# EAGLE board CT_schematic (EAGLE 7.6.0)

Size 100 x 80 mm. Coordinates in mm from the lower left corner, seen from the top.
Outline: 0,0 100,0 100,80 0,80 0,0
Copper layers (1*16): Top 0.035mm / dielectric 1.5mm / Bottom 0.035mm
Design rules "default": minimum track width 10mil, minimum drill 24mil, track to track 8mil, track to pad 8mil, pad to pad 8mil, via to via 8mil, smd to smd 8mil, copper to edge 40mil, drill to drill 8mil, minimum pad ring 10mil, minimum via ring 8mil, stop-mask expansion 4mil, vias tented up to drill 0mil, thermal gap 10mil

## Footprints (pad centres in the part's own frame; a part is rotated, then mirrored left to right if it is on the bottom)
C0603 = smd 0.8 x 0.8: 1 -0.762,0; 2 0.762,0
C0402 = smd 0.5 x 0.5: 1 -0.508,0; 2 0.508,0
C1210 = smd 1.2 x 2.5: 1 -1.524,0; 2 1.524,0
R0603 = smd 0.8 x 0.8: 1 -0.762,0; 2 0.762,0
EXV-9H = smd 3.505 x 1.676: 1 -2.857,0; 2 2.857,0
L0603 = smd 0.8 x 0.8: 1 -0.762,0; 2 0.762,0
IND25X25CZ = smd 2.489 x 3.429: 1 -2.718,0; 2 2.718,0
PJ-037B_PACKAGE = drill 3.7 square: 1 12,0 | drill 3.2 square: 2 6,0
UFBGA176_25 = smd 0.3 x 0.3: A1 -4.55,4.55; A2 -3.9,4.55; A3 -3.25,4.55; A4 -2.6,4.55; A5 -1.95,4.55; A6 -1.3,4.55; A7 -0.65,4.55; A8 0,4.55; A9 0.65,4.55; A10 1.3,4.55; A11 1.95,4.55; A12 2.6,4.55; A13 3.25,4.55; A14 3.9,4.55; A15 4.55,4.55; B1 -4.55,3.9; B2 -3.9,3.9; B3 -3.25,3.9; B4 -2.6,3.9; B5 -1.95,3.9; B6 -1.3,3.9; B7 -0.65,3.9; B8 0,3.9; B9 0.65,3.9; B10 1.3,3.9; B11 1.95,3.9; B12 2.6,3.9; B13 3.25,3.9; B14 3.9,3.9; B15 4.55,3.9; C1 -4.55,3.25; C2 -3.9,3.25; C3 -3.25,3.25; C4 -2.6,3.25; C5 -1.95,3.25; C6 -1.3,3.25; C7 -0.65,3.25; C8 0,3.25; C9 0.65,3.25; C10 1.3,3.25; C11 1.95,3.25; C12 2.6,3.25; C13 3.25,3.25; C14 3.9,3.25; C15 4.55,3.25; D1 -4.55,2.6; D2 -3.9,2.6; D3 -3.25,2.6; D4 -2.6,2.6; D5 -1.95,2.6; D6 -1.3,2.6; D7 -0.65,2.6; D8 0,2.6; D9 0.65,2.6; D10 1.3,2.6; D11 1.95,2.6; D12 2.6,2.6; D13 3.25,2.6; D14 3.9,2.6; D15 4.55,2.6; E1 -4.55,1.95; E2 -3.9,1.95; E3 -3.25,1.95; E4 -2.6,1.95; E12 2.6,1.95; E13 3.25,1.95; E14 3.9,1.95; E15 4.55,1.95; F1 -4.55,1.3; F2 -3.9,1.3; F3 -3.25,1.3; F4 -2.6,1.3; F6 -1.3,1.3; F7 -0.65,1.3; F8 0,1.3; F9 0.65,1.3; F10 1.3,1.3; F12 2.6,1.3; F13 3.25,1.3; F14 3.9,1.3; F15 4.55,1.3; G1 -4.55,0.65; G2 -3.9,0.65; G3 -3.25,0.65; G4 -2.6,0.65; G6 -1.3,0.65; G7 -0.65,0.65; G8 0,0.65; G9 0.65,0.65; G10 1.3,0.65; G12 2.6,0.65; G13 3.25,0.65; G14 3.9,0.65; G15 4.55,0.65; H1 -4.55,0; H2 -3.9,0; H3 -3.25,0; H4 -2.6,0; H6 -1.3,0; H7 -0.65,0; H8 0,0; H9 0.65,0; H10 1.3,0; H12 2.6,0; H13 3.25,0; H14 3.9,0; H15 4.55,0; J1 -4.55,-0.65; J2 -3.9,-0.65; J3 -3.25,-0.65; J4 -2.6,-0.65; J6 -1.3,-0.65; J7 -0.65,-0.65; J8 0,-0.65; J9 0.65,-0.65; J10 1.3,-0.65; J12 2.6,-0.65; J13 3.25,-0.65; J14 3.9,-0.65; J15 4.55,-0.65; K1 -4.55,-1.3; K2 -3.9,-1.3; K3 -3.25,-1.3; K4 -2.6,-1.3; K6 -1.3,-1.3; K7 -0.65,-1.3; K8 0,-1.3; K9 0.65,-1.3; K10 1.3,-1.3; K12 2.6,-1.3; K13 3.25,-1.3; K14 3.9,-1.3; K15 4.55,-1.3; L1 -4.55,-1.95; L2 -3.9,-1.95; L3 -3.25,-1.95; L4 -2.6,-1.95; L12 2.6,-1.95; L13 3.25,-1.95; L14 3.9,-1.95; L15 4.55,-1.95; M1 -4.55,-2.6; M2 -3.9,-2.6; M3 -3.25,-2.6; M4 -2.6,-2.6; M5 -1.95,-2.6; M6 -1.3,-2.6; M7 -0.65,-2.6; M8 0,-2.6; M9 0.65,-2.6; M10 1.3,-2.6; M11 1.95,-2.6; M12 2.6,-2.6; M13 3.25,-2.6; M14 3.9,-2.6; M15 4.55,-2.6; N1 -4.55,-3.25; N2 -3.9,-3.25; N3 -3.25,-3.25; N4 -2.6,-3.25; N5 -1.95,-3.25; N6 -1.3,-3.25; N7 -0.65,-3.25; N8 0,-3.25; N9 0.65,-3.25; N10 1.3,-3.25; N11 1.95,-3.25; N12 2.6,-3.25; N13 3.25,-3.25; N14 3.9,-3.25; N15 4.55,-3.25; P1 -4.55,-3.9; P2 -3.9,-3.9; P3 -3.25,-3.9; P4 -2.6,-3.9; P5 -1.95,-3.9; P6 -1.3,-3.9; P7 -0.65,-3.9; P8 0,-3.9; P9 0.65,-3.9; P10 1.3,-3.9; P11 1.95,-3.9; P12 2.6,-3.9; P13 3.25,-3.9; P14 3.9,-3.9; P15 4.55,-3.9; R1 -4.55,-4.55; R2 -3.9,-4.55; R3 -3.25,-4.55; R4 -2.6,-4.55; R5 -1.95,-4.55; R6 -1.3,-4.55; R7 -0.65,-4.55; R8 0,-4.55; R9 0.65,-4.55; R10 1.3,-4.55; R11 1.95,-4.55; R12 2.6,-4.55; R13 3.25,-4.55; R14 3.9,-4.55; R15 4.55,-4.55
SAMTEC_FTSH-105-01-L-DV-K = smd 0.762 x 2.794: 1 -2.54,-2.032; 2 -2.54,2.032; 3 -1.27,-2.032; 4 -1.27,2.032; 5 0,-2.032; 6 0,2.032; 7 1.27,-2.032; 8 1.27,2.032; 9 2.54,-2.032; 10 2.54,2.032
TDFN-8/6MM = smd 0.3 x 0.75: 1 0,0; 2 0.5,0; 3 1,0; 4 1.5,0; 5 1.5,3; 6 1,3; 7 0.5,3; 8 0,3
SOIC-8 = smd 1.6 x 0.6: 1 -2.7,1.905 | smd 1.55 x 0.6: 2 -2.7,0.635; 3 -2.7,-0.635; 4 -2.7,-1.905; 5 2.7,-1.905; 6 2.7,-0.635; 7 2.7,0.635; 8 2.7,1.905
182-009-MALE = drill 1.194 pad 1.524 octagon: 1 -5.537,10.923; 2 -2.769,10.923; 3 0,10.923; 4 2.769,10.923; 5 5.537,10.923; 6 -4.153,8.08; 7 -1.384,8.08; 8 1.384,8.08; 9 4.153,8.08 | hole 3.048: -12.446,9.501; 12.446,9.501
ABS07-32.768KHZ-7-T = smd 1.1 x 2.4: 1 -2.5,0; 2 0,0
ASFL1 = smd 1.7 x 1.5: 1 -1.27,-1.1; 2 1.27,-1.1; 3 1.27,1.1; 4 -1.27,1.1
IR3899MTR1PBF = smd 0.25 x 0.75: 1 0,0; 2 0.5,0; 3 1,0; 4 1.5,0; 5 2,0; 6 2.5,0; 7 3,0 | smd 0.75 x 0.25: 8 3.425,0.78; 9 3.425,1.28; 10 3.425,1.78; 14 -0.425,1.78; 15 -0.425,1.28; 16 -0.425,0.78 | smd 0.3 x 1.95: 11 3.22,3.63 | smd 1.62 x 2.42: 12 1.786,3.8 | smd 1 x 1.95: 13 0.117,3.63 | smd 2.19 x 1.25: 17 1.51,1.26
WSON-8 = smd 0.3 x 0.6: 1 -0.75,0; 2 0.05,0; 3 0.85,0; 4 1.65,0; 5 1.65,3.8; 6 0.85,3.8; 7 0.05,3.8; 8 -0.75,3.8 | smd 3 x 2.6: PAD 0.45,1.9
SON-6 = smd 0.55 x 0.3: 1 -0.355,0.5 | smd 0.52 x 0.3: 2 -0.37,0; 3 -0.37,-0.5; 4 0.37,-0.5; 5 0.37,0; 6 0.37,0.5
SW_4-1437565-2 = smd 1.4 x 2.1: 1 -2.23,4.55; 2 -2.23,-4.55; 3 2.23,4.55; 4 2.23,-4.55
LGM67K-G1J2-24-Z = smd 0.8 x 1.4: A -2,0; C 0,0
NC7SZ125M5X = smd 1.3 x 0.7: 1 -1.3,0.95; 2 -1.3,0; 3 -1.3,-0.95; 4 1.3,-0.95; 5 1.3,0.95

## Placement (x,y rotation side)
C1  1e-06  [C0603]  -64.77,73.66 0 top  (outside the outline)
C2  1e-07  [C0603]  -68.58,73.66 0 top  (outside the outline)
C3  1e-07  [C0603]  -72.39,73.66 0 top  (outside the outline)
C4  1e-07  [C0603]  -76.2,73.66 0 top  (outside the outline)
C5  1e-07  [C0603]  -80.01,73.66 0 top  (outside the outline)
C6  1e-07  [C0603]  -15.24,78.74 0 top  (outside the outline)
C7  1e-07  [C0603]  -19.05,78.74 0 top  (outside the outline)
C8  1e-07  [C0603]  -22.86,78.74 0 top  (outside the outline)
C9  1e-07  [C0603]  -26.67,78.74 0 top  (outside the outline)
C10  1e-07  [C0603]  -30.48,78.74 0 top  (outside the outline)
C11  1e-07  [C0603]  -34.29,78.74 0 top  (outside the outline)
C12  1e-07  [C0603]  -38.1,78.74 0 top  (outside the outline)
C13  1e-07  [C0603]  -41.91,78.74 0 top  (outside the outline)
C14  1e-07  [C0603]  -45.72,78.74 0 top  (outside the outline)
C15  1e-07  [C0603]  -49.53,78.74 0 top  (outside the outline)
C16  1e-07  [C0603]  -53.34,78.74 0 top  (outside the outline)
C17  4.7e-06  [C0603]  -49.53,73.66 0 top  (outside the outline)
C18  1e-07  [C0603]  -57.15,78.74 0 top  (outside the outline)
C19  1e-08  [C0603]  -60.96,78.74 0 top  (outside the outline)
C20  1e-06  [C0603]  -64.77,78.74 0 top  (outside the outline)
C21  1e-07  [C0603]  -68.58,78.74 0 top  (outside the outline)
C22  2.2e-06  [C0603]  -53.34,73.66 0 top  (outside the outline)
C23  2.2e-06  [C0603]  -57.15,73.66 0 top  (outside the outline)
C24  1e-11  [C0402]  -60.96,83.82 0 top  (outside the outline)
C25  1e-11  [C0402]  -64.77,83.82 0 top  (outside the outline)
C26  1e-07  [C0402]  -68.58,83.82 0 top  (outside the outline)
C27  1e-08  [C0402]  -72.39,83.82 0 top  (outside the outline)
C28  1e-06  [C0603]  -72.39,78.74 0 top  (outside the outline)
C29  1e-06  [C0603]  -76.2,78.74 0 top  (outside the outline)
C30  1e-08  [C0402]  -76.2,83.82 0 top  (outside the outline)
C31  0.0001  [C1210]  -48.26,62.23 0 top  (outside the outline)
C32  2.2e-06  [C0603]  -60.96,73.66 0 top  (outside the outline)
C33  1e-07  [C0402]  -80.01,83.82 0 top  (outside the outline)
C34  1e-07  [C0402]  -15.24,88.9 0 top  (outside the outline)
C35  6.9430689229727e-09  [R0603]  -77.47,60.96 0 top  (outside the outline)
C36  2.3669553146498e-07  [R0603]  -20.32,68.58 0 top  (outside the outline)
C39  8e-07  [R0603]  -80.01,78.74 0 top  (outside the outline)
C40  1e-05  [C1210]  -54.61,62.23 0 top  (outside the outline)
C41  1e-07  [C0402]  -19.05,88.9 0 top  (outside the outline)
C42  0.0001  [EXV-9H]  -54.61,53.34 0 top  (outside the outline)
C43  0.0001  [EXV-9H]  -66.04,53.34 0 top  (outside the outline)
C44  1e-08  [C0402]  -22.86,88.9 0 top  (outside the outline)
C45  1e-08  [C0402]  -26.67,88.9 0 top  (outside the outline)
F1  240.0  [L0603]  -15.24,83.82 0 top  (outside the outline)
I1  6.8e-07  [IND25X25CZ]  -76.2,53.34 0 top  (outside the outline)
J1  PJ-037B  [PJ-037B_PACKAGE]  -71.12,29.21 0 top  (outside the outline)
R2  1000.0  [R0603]  -19.05,83.82 0 top  (outside the outline)
R7  4700.0  [R0603]  -22.86,83.82 0 top  (outside the outline)
R8  2200.0  [R0603]  -26.67,83.82 0 top  (outside the outline)
R10  2200.0  [R0603]  -30.48,83.82 0 top  (outside the outline)
R12  10000.0  [R0603]  -66.04,68.58 0 top  (outside the outline)
R13  10000.0  [R0603]  -71.12,68.58 0 top  (outside the outline)
R14  10000.0  [R0603]  -76.2,68.58 0 top  (outside the outline)
R15  10000.0  [R0603]  -15.24,73.66 0 top  (outside the outline)
R16  10000.0  [R0603]  -20.32,73.66 0 top  (outside the outline)
R17  10000.0  [R0603]  -25.4,73.66 0 top  (outside the outline)
R18  5.0  [R0603]  -34.29,83.82 0 top  (outside the outline)
R19  120.0  [R0603]  -38.1,83.82 0 top  (outside the outline)
R20  0.1  [R0603]  -41.91,83.82 0 top  (outside the outline)
R21  4030.2416170974  [R0603]  -27.94,68.58 0 top  (outside the outline)
R22  719.68600305311  [R0603]  -35.56,68.58 0 top  (outside the outline)
R23  75.0  [R0603]  -45.72,83.82 0 top  (outside the outline)
R24  130.0  [R0603]  -49.53,83.82 0 top  (outside the outline)
R25  39000.0  [R0603]  -30.48,73.66 0 top  (outside the outline)
R26  49900.0  [R0603]  -35.56,73.66 0 top  (outside the outline)
R27  5760.0  [R0603]  -53.34,83.82 0 top  (outside the outline)
R28  100000.0  [R0603]  -40.64,68.58 0 top  (outside the outline)
R29  300000.0  [R0603]  -45.72,68.58 0 top  (outside the outline)
R30  100000.0  [R0603]  -50.8,68.58 0 top  (outside the outline)
R31  10000.0  [R0603]  -40.64,73.66 0 top  (outside the outline)
R32  10000.0  [R0603]  -45.72,73.66 0 top  (outside the outline)
R33  9100.0  [R0603]  -57.15,83.82 0 top  (outside the outline)
R34  680000.0  [R0603]  -55.88,68.58 0 top  (outside the outline)
R35  120000.0  [R0603]  -60.96,68.58 0 top  (outside the outline)
U1  STM32F767IGK6  [UFBGA176_25]  -48.26,27.94 0 top  (outside the outline)
U2  FTSH-105-01-L-DV-K  [SAMTEC_FTSH-105-01-L-DV-K]  -35.56,30.48 0 top  (outside the outline)
U3  24AA01T-I/MNY  [TDFN-8/6MM]  -58.42,41.91 0 top  (outside the outline)
U4  MCP2562-E/SN  [SOIC-8]  -71.12,41.91 0 top  (outside the outline)
U5  182-009-113R531  [182-009-MALE]  -36.83,6.35 0 top  (outside the outline)
U6  ABS07-32.768KHZ-7-T  [ABS07-32.768KHZ-7-T]  -27.94,62.23 0 top  (outside the outline)
U7  ASFL1-25MHZ-NCS  [ASFL1]  -45.72,53.34 0 top  (outside the outline)
U8  IR3899MTR1PBF  [IR3899MTR1PBF]  -44.45,40.64 0 top  (outside the outline)
U9  LP2951ACSDX/NOPB  [WSON-8]  -29.21,52.07 0 top  (outside the outline)
U10  TPS3895ADRYR  [SON-6]  -29.21,87.63 0 top  (outside the outline)
U11  4-1437565-2  [SW_4-1437565-2]  -27.94,43.18 0 top  (outside the outline)
U12  Q65110A2395  [LGM67K-G1J2-24-Z]  -36.83,62.23 0 top  (outside the outline)
U13  nc7sz125m5x  [NC7SZ125M5X]  -59.69,60.96 0 top  (outside the outline)
U14  nc7sz125m5x  [NC7SZ125M5X]  -66.04,60.96 0 top  (outside the outline)

## Library data of the parts
C1-C36 C39-C45 F1 I1 J1 R2 R7 R8 R10 R12-R35 U1-U14 = circuit_tree

## Nets
CLK_CRYSTAL_U1_E1: C24.1 U1.E1 U6.1
CLK_CRYSTAL_U1_F1: C25.1 U1.F1 U6.2
CLK_U1_G1: U1.G1 U7.3
GND: C1.2 C2.2 C3.2 C4.2 C5.2 C6.2 C7.2 C8.2 C9.2 C10.2 C11.2 C12.2 C13.2 C14.2 C15.2 C16.2 C17.2 C18.2 C19.2 C20.2 C21.2 C22.2 C23.2 C24.2 C25.2 C26.2 C27.2 C28.2 C29.2 C30.2 C32.2 C33.2 C34.2 C39.2 C40.2 C41.2 C42.2 C43.2 C44.2 C45.2 J1.2 R2.2 R12.2 R14.2 R18.2 R20.1 R20.2 R22.2 R25.2 R27.2 R30.2 R33.2 R35.2 U1.D5 U1.D7 U1.D8 U1.D9 U1.F2 U1.F6 U1.F7 U1.F8 U1.F9 U1.F10 U1.F12 U1.G2 U1.G6 U1.G7 U1.G8 U1.G9 U1.G10 U1.G12 U1.H6 U1.H7 U1.H8 U1.H9 U1.H10 U1.H12 U1.J6 U1.J7 U1.J8 U1.J9 U1.J10 U1.K6 U1.K7 U1.K8 U1.K9 U1.K10 U1.M1 U1.M8 U1.M9 U1.N1 U2.3 U2.5 U3.4 U3.7 U4.2 U4.8 U5.5 U7.2 U8.4 U8.11 U8.17 U9.3 U9.4 U9.PAD U10.2 U12.C U13.2 U13.3 U14.1 U14.3
NET_U1_A5: R8.1 U1.A5 U3.6
NET_U1_B4: R10.1 U1.B4 U3.5
NET_U1_C6: R13.1 U1.C6
NET_U1_D6: R12.1 U1.D6
NET_U1_F13: C23.1 U1.F13
NET_U1_J1: R7.1 U1.J1 U14.4
NET_U1_L4: R14.1 U1.L4
NET_U1_M10: C22.1 U1.M10
NET_U1_R1: C19.1 C20.1 F1.1 U1.P1 U1.R1
NET_U1_R14: U12.A
NET_U1_R15: U11.3 U11.4
NET_U2_9: R18.1 U2.9
NET_U4_6: R19.2 U4.6
NET_U5_2: R19.2 U4.6 U5.2
NET_U5_3: R19.1 U4.7 U5.3
NET_U8_1: C35.1 R21.1 R22.1 R23.1 R24.1 U8.1 U8.8
NET_U8_2: C34.1 U8.2
NET_U8_3: C35.2 C36.1 C36.2 U8.3
NET_U8_5: R25.1 U8.5
NET_U8_10: C32.1 U8.10
NET_U8_12: C31.1 I1.1 U8.12
NET_U8_13: U8.13
NET_U8_14: C31.2 U8.14
NET_U8_15: R26.1 R27.1 U8.15
NET_U8_ATNET_3: I1.2 R21.2
NET_U8_ATNET_4: C36.2 R23.2
NET_U8_ATNET_5: R24.2
NET_U9_5: R28.1 U9.5
NET_U9_7: R29.2 R30.1 U9.7
NET_U10_1: R32.1 R33.1 U10.1
NET_U10_3: R34.2 R35.1 U10.3
NET_U10_4: R31.1 U10.4 U13.4 U14.2
NET_U11_1: R2.1 U11.1 U11.2
PROC_CAN1_RX: U1.B12 U4.4
PROC_CAN1_TX: U1.B15 U4.1
PROC_SYS_JTCK_SWCLK: R16.1 U1.A14 U2.4
PROC_SYS_JTDO_SWO: U1.A10 U2.6
PROC_SYS_JTMS_SWDIO: R17.1 U1.A15 U2.2
RST_OUT_U2_JTAG_RST_B: R15.1 U2.10 U13.1
VCC_S1_15V2: C33.1 C39.1 C42.1 C43.1 J1.1 R26.2 U8.9 U9.8
VCC_TIER1_3V3: C1.1 C2.1 C3.1 C4.1 C5.1 C6.1 C7.1 C8.1 C9.1 C10.1 C11.1 C12.1 C13.1 C14.1 C15.1 C16.1 C17.1 C18.1 C21.1 C26.1 C27.1 C29.1 C30.1 C41.1 C44.1 C45.1 F1.2 I1.2 R7.2 R8.2 R10.2 R13.2 R15.2 R16.2 R17.2 R21.2 R31.2 R32.2 R34.1 U1.C1 U1.C5 U1.C7 U1.C8 U1.C9 U1.F3 U1.G3 U1.G13 U1.H13 U1.J12 U1.J13 U1.K4 U1.N8 U1.N9 U1.N10 U2.1 U3.8 U4.5 U7.4 U10.6 U13.5 U14.5
VCC_TIER1_5V0: C28.1 C40.1 R28.2 R29.1 U4.3 U9.1

## Tracks (layer width: path | path; a pad name or v marks a point on that pad's centre or on a via)
CLK_CRYSTAL_U1_E1  (2 unrouted)
CLK_CRYSTAL_U1_F1  (2 unrouted)
CLK_U1_G1  (1 unrouted)
GND  (110 unrouted)
NET_U1_A5  (2 unrouted)
NET_U1_B4  (2 unrouted)
NET_U1_C6  (1 unrouted)
NET_U1_D6  (1 unrouted)
NET_U1_F13  (1 unrouted)
NET_U1_J1  (2 unrouted)
NET_U1_L4  (1 unrouted)
NET_U1_M10  (1 unrouted)
NET_U1_R1  (4 unrouted)
NET_U1_R15  (1 unrouted)
NET_U2_9  (1 unrouted)
NET_U4_6  (1 unrouted)
NET_U5_2  (2 unrouted)
NET_U5_3  (2 unrouted)
NET_U8_1  (6 unrouted)
NET_U8_2  (1 unrouted)
NET_U8_3  (3 unrouted)
NET_U8_5  (1 unrouted)
NET_U8_10  (1 unrouted)
NET_U8_12  (2 unrouted)
NET_U8_14  (1 unrouted)
NET_U8_15  (2 unrouted)
NET_U8_ATNET_3  (1 unrouted)
NET_U8_ATNET_4  (1 unrouted)
NET_U9_5  (1 unrouted)
NET_U9_7  (2 unrouted)
NET_U10_1  (2 unrouted)
NET_U10_3  (2 unrouted)
NET_U10_4  (3 unrouted)
NET_U11_1  (2 unrouted)
PROC_CAN1_RX  (1 unrouted)
PROC_CAN1_TX  (1 unrouted)
PROC_SYS_JTCK_SWCLK  (2 unrouted)
PROC_SYS_JTDO_SWO  (1 unrouted)
PROC_SYS_JTMS_SWDIO  (2 unrouted)
RST_OUT_U2_JTAG_RST_B  (2 unrouted)
VCC_S1_15V2  (7 unrouted)
VCC_TIER1_3V3  (60 unrouted)
VCC_TIER1_5V0  (5 unrouted)